# Altium PCB 水杯测试点.PcbDoc
Units mm, origin at the board's own origin, x right, y up, seen from the top; angles counter-clockwise.
Board outline 66.4 x 64.2 mm, 2 copper layers (Top Layer, Bottom Layer), stack 1.671 mm thick; 9 components, 0 nets, 30 pads, 0 vias.
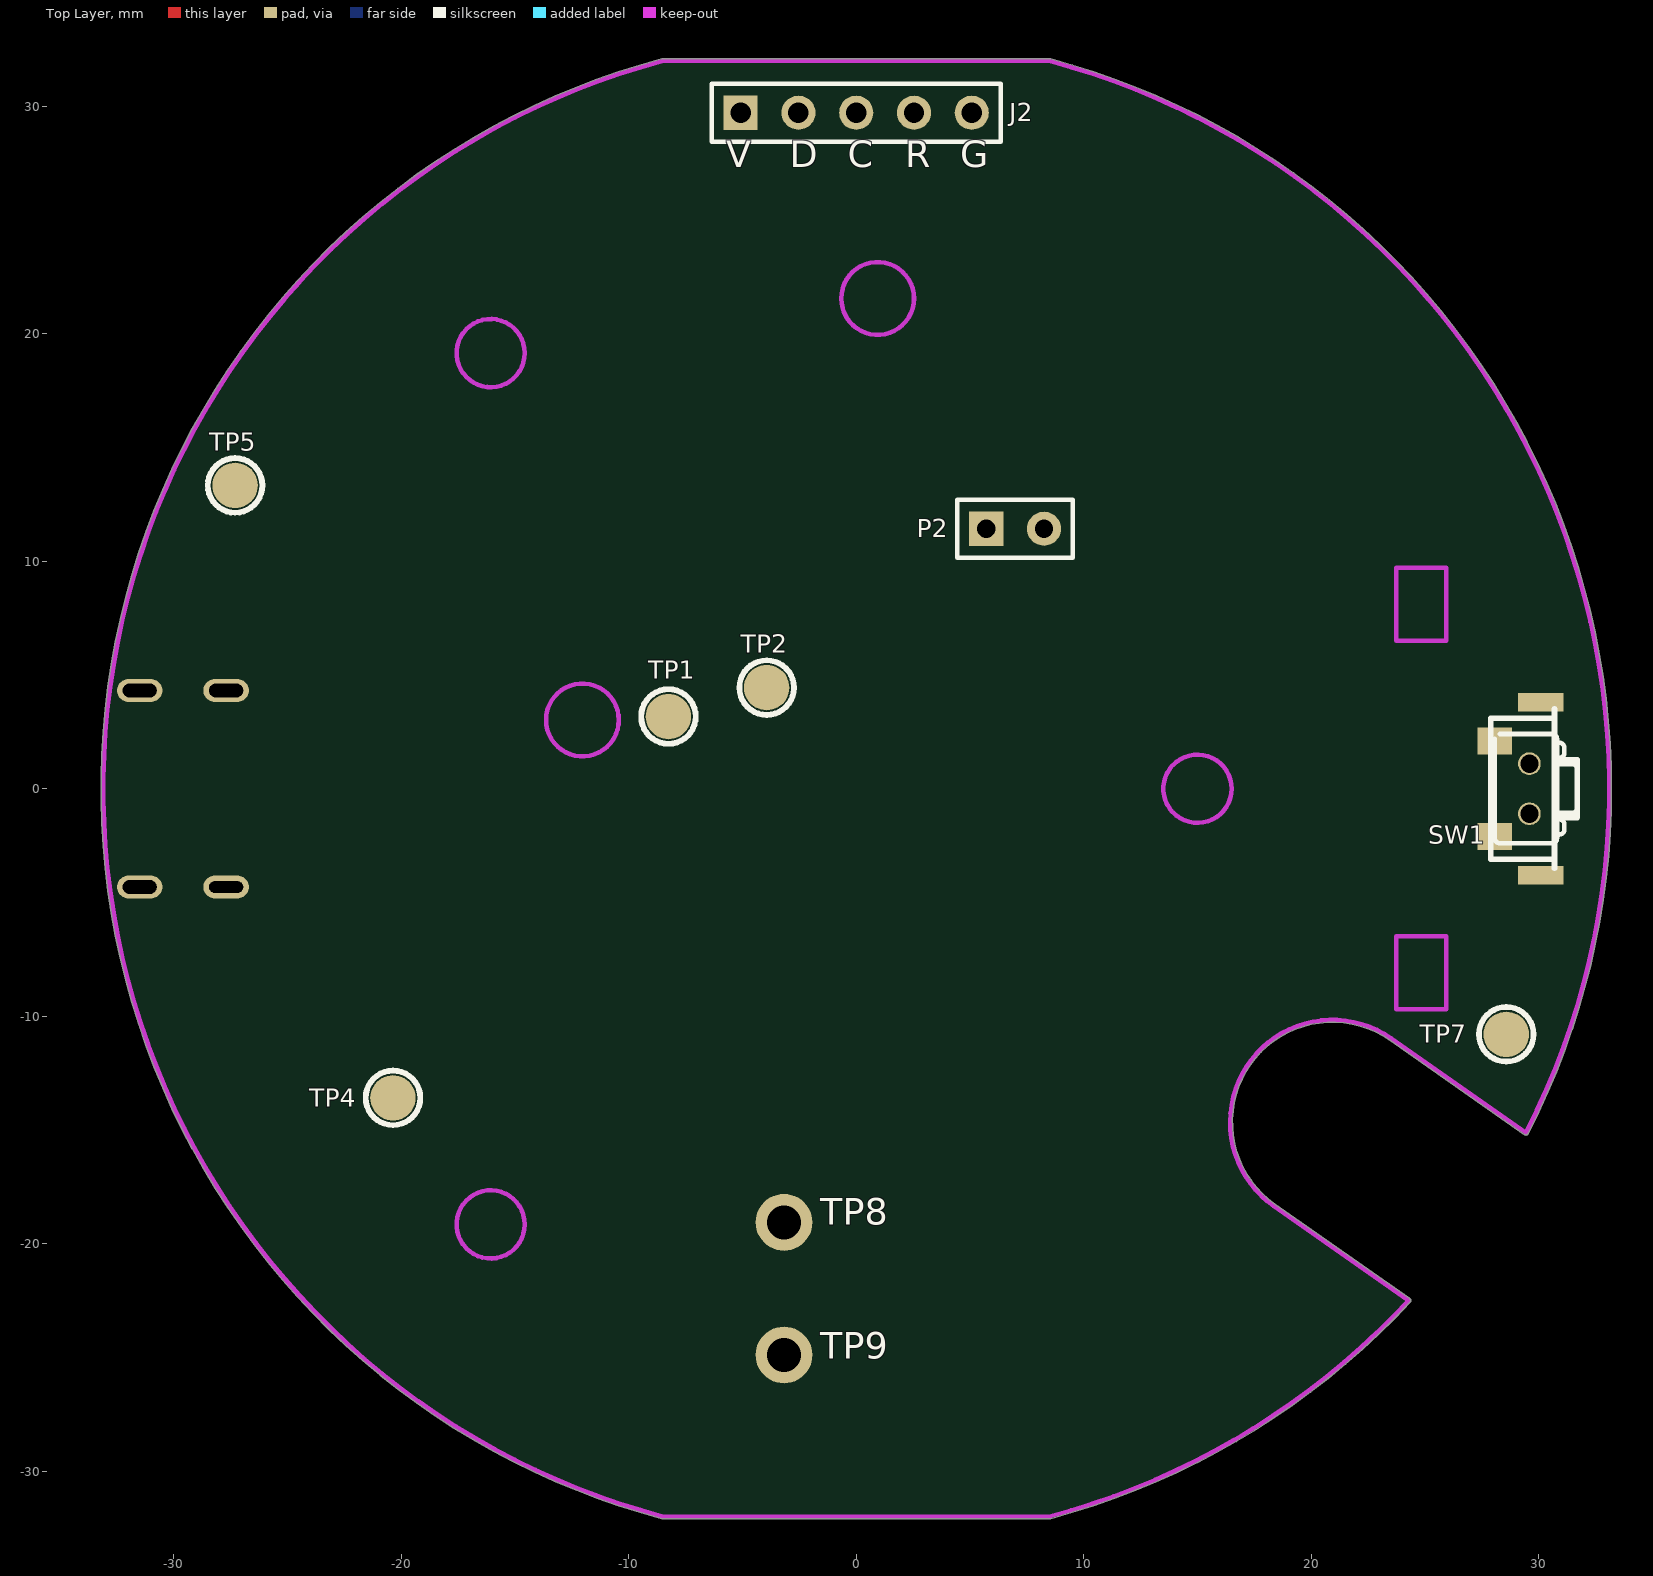
[diagram p0: Top Layer view]
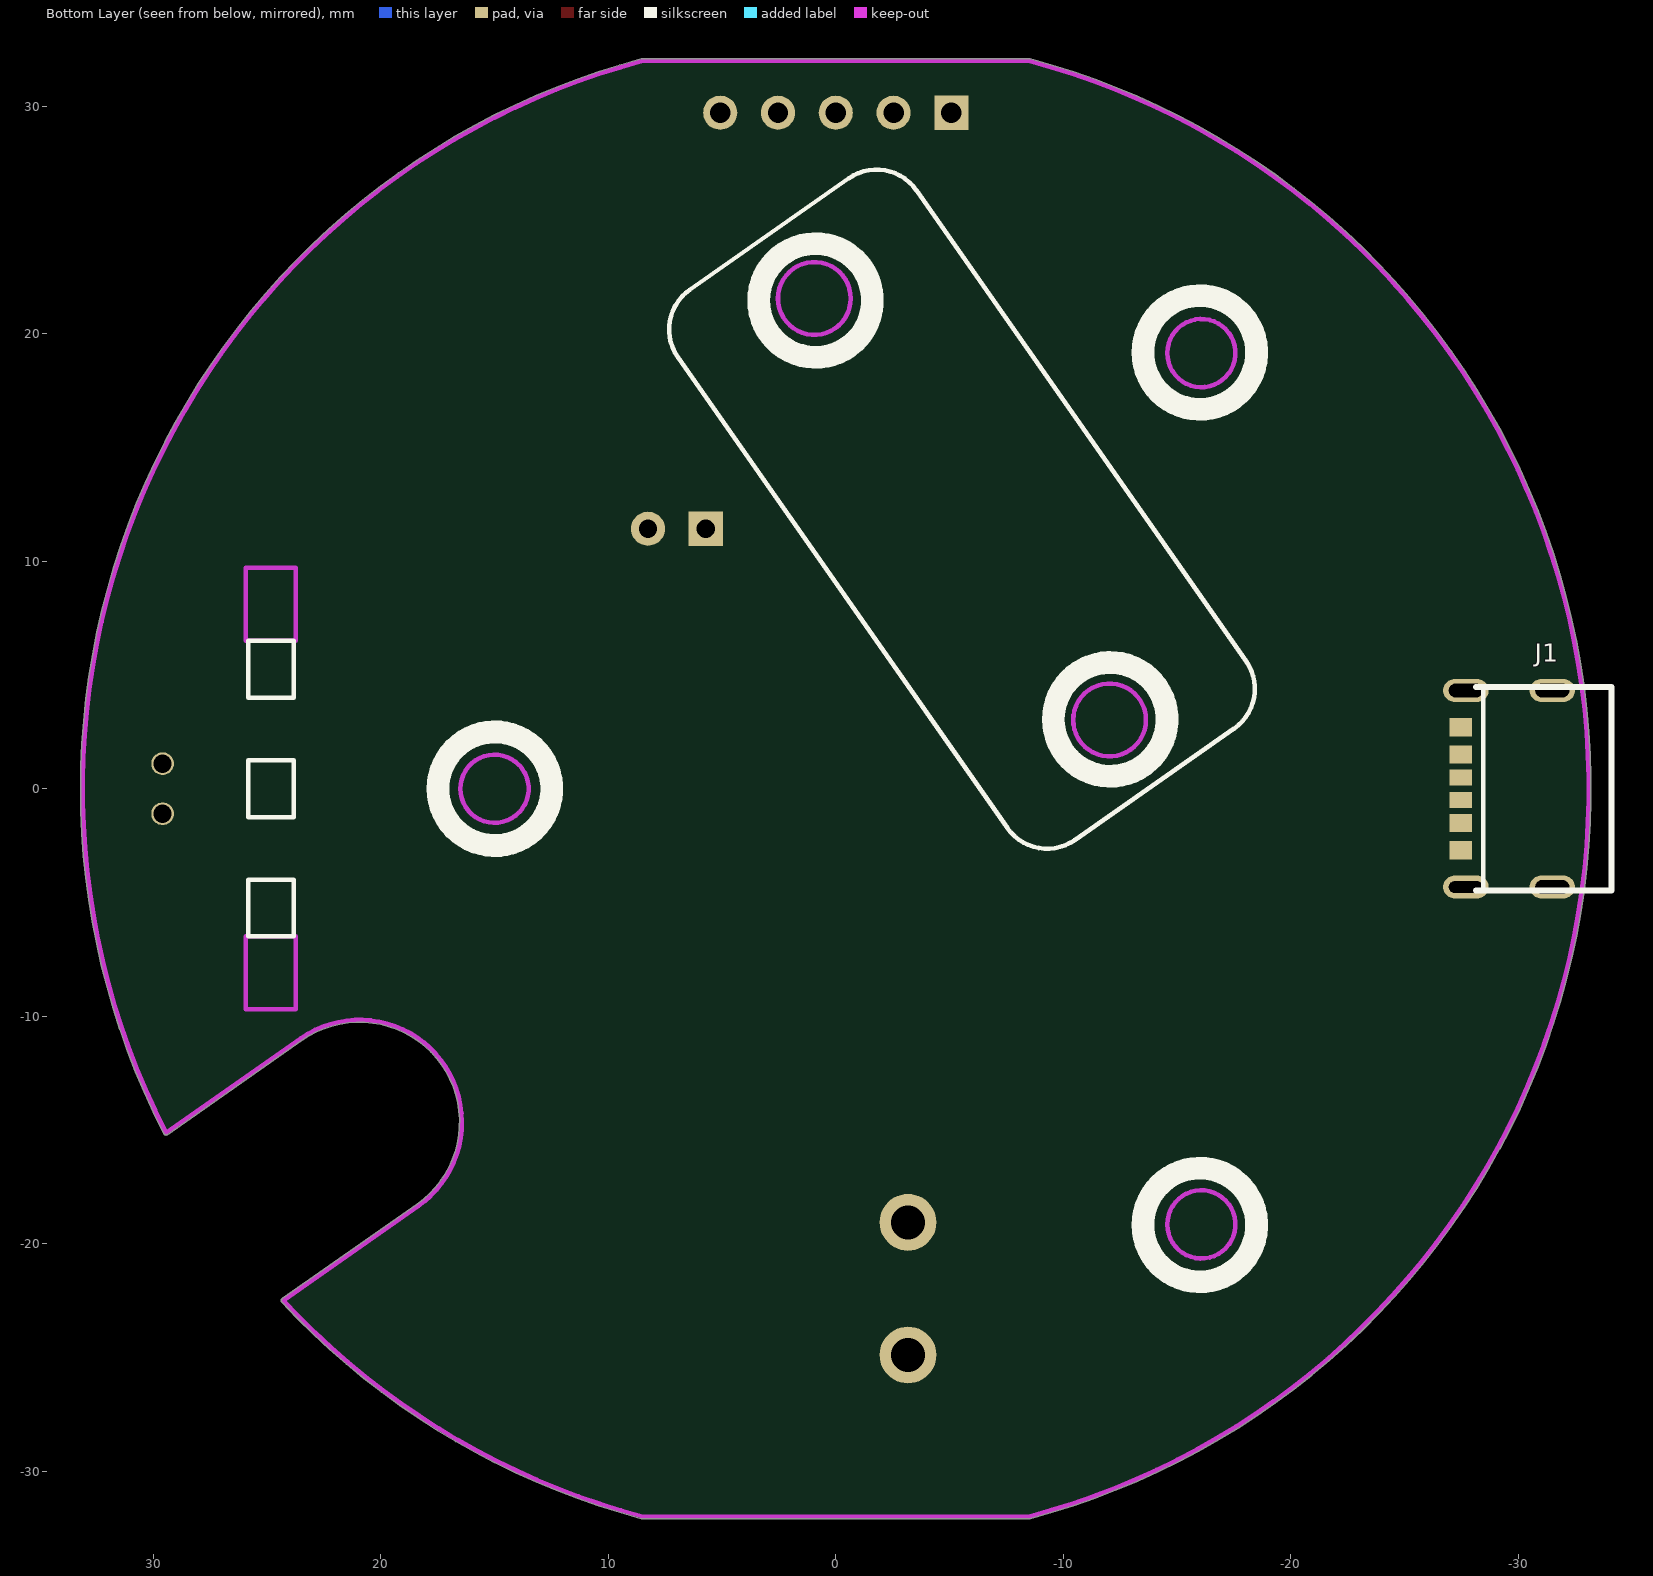
[diagram p1: Bottom Layer view, seen from below]

## Layer stack, top to bottom
Top Solder: solder mask 0.0102, Solder Resist, Dk 3.5
Top Layer: signal copper 0.0356
Dielectric 1: dielectric 1.6, FR-4, Dk 4.8
Bottom Layer: signal copper 0.0356
Bottom Solder: solder mask 0.0102, Solder Resist, Dk 3.5

## Board outline
-8.538,-32.084 ccw(c-8.482,-32) -8.482,-32.1 8.487,-32.1 ccw(c8.487,-32) 8.546,-32.081 ccw(c0,0) 24.35,-22.568 ccw(c24.277,-22.5) 24.377,-22.5 ccw(c24.277,-22.5) 24.341,-22.423 ccw(c24.257,-22.478) 24.315,-22.396 18.413,-18.263 cw(c20.936,-14.659) 23.46,-11.055 cw(c23.518,-10.973) 23.46,-11.055 29.385,-15.204 ccw(c29.443,-15.122) 29.543,-15.132 ccw(c29.477,-15.056) 29.567,-15.102 ccw(c0,0) 33.2,0 ccw(c0,0) 8.535,32.085 ccw(c8.482,32) 8.482,32.1 -8.488,32.1 ccw(c-8.488,32) -8.545,32.082 ccw(c0,0)

## Design rules (kind name [scope] priority, off if disabled: settings)
Clearance Clearance_1 [All vs InPolygon] p1: gap=0.508
Clearance [All] p2: gap=0.2
PolygonConnect PolygonConnect_1 [isvia] p1: connectstyle=Direct reliefconductorwidth=0.254 reliefentries=4 polygonreliefangle="90 Angle" airgapwidth=0.254
PolygonConnect [All] p2: connectstyle=Relief reliefconductorwidth=0.254 reliefentries=4 polygonreliefangle="90 Angle" airgapwidth=0.254
RoutingVias [All] p1: holewidth=0.711 width=1.27 viastyle="Through Hole" minholewidth=0.711 minwidth=1.27 maxholewidth=0.711 maxwidth=1.27
SolderMaskExpansion [All] p1: expansion=0.102
Width [All] p1: maxlimit=1 minlimit=0.254 preferedwidth=0.254
29 further rules are at their usual default settings.

## Components (designator, comment, footprint, x,y, rotation, side; value= is the part's Value field where it differs from the comment)
J1 "TYPE-C" USB-TYPE-C-6P -29.6,0 r90 bottom
J2 "OCDD" sip-5 0,29.719 r0 top
P2 "2.54mm直插" SIP-2 6.985,11.43 r0 top
SW1 "SW-BP" PB-3*6*3.5侧 29.591,0.001 r90 top
TP1 "testpoint" TP -8.255,3.175 r0 top
TP2 "testpoint" TP -3.937,4.445 r0 top
TP4 "testpoint" TP -20.364,-13.589 r0 top
TP5 "testpoint" TP -27.305,13.335 r0 top
TP7 "testpoint" TP 28.575,-10.795 r0 top

## Footprints (in the part's own frame and the unit in brackets; to place one, negate y for a bottom-side part, rotate by r counter-clockwise, add the part's x,y. Pads: shape width x height; smd on the part's side, far side on the other; paste and mask are expansions set on the pad)
PB-3*6*3.5侧 [mm] "3*6*2.5贴片按键"
  rect 0.8x2 smd: 0(-3.8,-0.508) 0(3.8,-0.508)
  round 1 hole 0.8: 0(-1.1,0) 0(1.1,0)
  rect 1.2x1.5 smd: 1(-2.1,1.524) 2(2.1,1.524)
  silkscreen extent -3.5,-2.1 3.5,1.7
SIP-2 [mm]
  rect 1.5x1.5 hole 0.8: 1(-1.27,0)
  round 1.5 hole 0.8: 2(1.27,0)
  silkscreen extent -2.54,-1.27 2.54,1.27
sip-5 [mm]
  rect 1.5x1.5 hole 0.9: 1(-5.08,0)
  round 1.5 hole 0.9: 2(-2.54,0) 3(0,0) 4(2.54,0) 5(5.08,0)
  silkscreen extent -6.35,-1.27 6.35,1.27
TP [mm] "Test Point"
  round 2 smd: 1(0,0)
  silkscreen extent -1.2,-1.2 1.2,1.2
USB-TYPE-C-6P [mm] "USN MINI"
  oval 1x2 hole 0.6 slot 1.5 at 90 deg: 0(-4.32,-1.9) 0(4.32,-1.9) 0(4.32,1.9)
  oval 1x2 hole 0.5 slot 1.5 at 90 deg: 0(-4.32,1.9)
  rect 0.8x1 smd: 1(-2.7,2.126) 2(-1.5,2.126) 5(1.5,2.126) 6(2.7,2.126)
  rect 0.7x1 smd: 3(-0.5,2.126) 4(0.5,2.126)
  silkscreen extent -4.47,-4.5 4.47,1.45, body extent -4.47,-5.21 4.47,2.69, height 3.08

## Part data
J1: library part SIP-6, "USB 3.1 Type-C 2.0短体母座 6P贴片式"
J2: library part SIP-5, "下载口(NC)"
P2: library part RES3, "直插件"
SW1: "3*6*3.5侧贴按键(编带)"
TP1 TP2 TP4 TP5 TP7: library part TP-1, "测试点"

## Free pads (board coordinates)
  round 2.5 hole 1.5: 0(-3.175,-19.06) 1(-3.175,-24.892)

## Nets (pads, with @x,y where several pads share a name; then routed paths per layer and width w, separated by ;. In a path a pad name is that pad's centre, name@x,y a point inside that pad or via, vN(x,y) a via of type N, cw(c..) or ccw(c..) an arc to the next point about the centre after c; other vN are vias at no path point)
pads on no net: J1.0 J1.1 J1.2 J1.3 J1.4 J1.5 J1.6 J2.1 J2.2 J2.3 J2.4 J2.5 P2.1 P2.2 SW1.0 SW1.1 SW1.2 TP1.1 TP2.1 TP4.1 TP5.1 TP7.1

## Keep-outs
Keep-Out Layer:
  circle w0.2: c0.939,21.554 r1.6
  circle w0.2: c15,0 r1.5
  circle w0.2: c-16.07,-19.151 r1.5
  circle w0.2: c-16.07,19.151 r1.5
  circle w0.2: c-12.036,3.024 r1.6
  lines w0.2: -8.488,31.994 ccw(c0,0) -8.482,-31.995 ; -8.488,32 8.482,32 ; -8.482,-32 8.487,-32 ; 8.482,31.995 cw(c0,0) 29.477,-15.056 ; 8.485,-31.994 ccw(c0,0) 24.277,-22.5 ; 24.257,-22.478 18.355,-18.345 cw(c20.936,-14.659) 23.518,-10.973 29.443,-15.122 ; 23.731,-9.694 25.931,-9.694 25.931,-6.494 23.731,-6.494 23.731,-9.694 ; 23.731,6.506 23.731,9.706 25.931,9.706 25.931,6.506 23.731,6.506

## Silkscreen, mask and mechanical layers (free items; w line width, h text height)
Top Overlay:
  lines w0.2: 28.075,2.193 28.075,-2.181 ccw(c28.288,-2.181) 28.288,-2.394 30.592,-2.394 ccw(c30.592,-2.181) 30.806,-2.181 30.806,2.193 ccw(c30.592,2.193) 30.592,2.406 28.288,2.406 ; 30.806,-2.011 30.912,-2.011 ccw(c30.912,-1.797) 31.126,-1.797 31.126,-1.556 ccw(c30.912,-1.556) 30.912,-1.343 30.806,-1.343 ; 30.806,-1.061 31.488,-1.061 ccw(c31.488,-0.847) 31.702,-0.847 31.702,0.859 ccw(c31.488,0.859) 31.488,1.073 30.806,1.073 ; 30.806,1.355 30.912,1.355 ccw(c30.912,1.568) 31.126,1.568 31.126,1.809 ccw(c30.912,1.809) 30.912,2.023 30.806,2.023
  text "V" at -5.715,26.925 h2
  text "D" at -2.921,26.925 h2
  text "C" at -0.381,26.925 h2
  text "R" at 2.159,26.925 h2
  text "G" at 4.572,26.925 h2
  text "TP8" at -1.575,-19.558 h2
  text "TP9" at -1.575,-25.451 h2
Bottom Overlay:
  circle w1: c0.889,21.464 r2.5
  circle w1: c-16.002,19.178 r2.5
  circle w1: c-16.002,-19.176 r2.5
  circle w1: c-12.065,3.049 r2.5
  circle w1: c14.986,0.001 r2.5
  lines w0.2: -28.464,-4.469 -28.464,-2.889 -28.464,2.891 -28.464,4.471 ; -10.522,-2.252 -17.512,2.643 cw(c-16.288,4.39) -18.036,5.614 -3.545,26.309 cw(c-1.797,25.086) -0.573,26.833 6.417,21.939 cw(c5.193,20.191) 6.941,18.968 -7.551,-1.728 ; -10.515,-2.25 ccw(c-9.292,-0.503) -7.544,-1.727 ; 23.831,-6.494 23.831,-3.994 25.831,-3.994 25.831,-6.494 23.831,-6.494 ; 23.831,-1.244 23.831,1.256 25.831,1.256 25.831,-1.244 23.831,-1.244 ; 23.831,4.006 23.831,6.506 25.831,6.506 25.831,4.006 23.831,4.006